# Altium PCB PCB_Auto_sedzia.PcbDoc
Units mm, origin at the board's own origin, x right, y up, seen from the top; angles counter-clockwise.
Board outline 95 x 65 mm, 2 copper layers (Top Layer, Bottom Layer); 65 components, 47 nets, 273 pads, 48 vias.
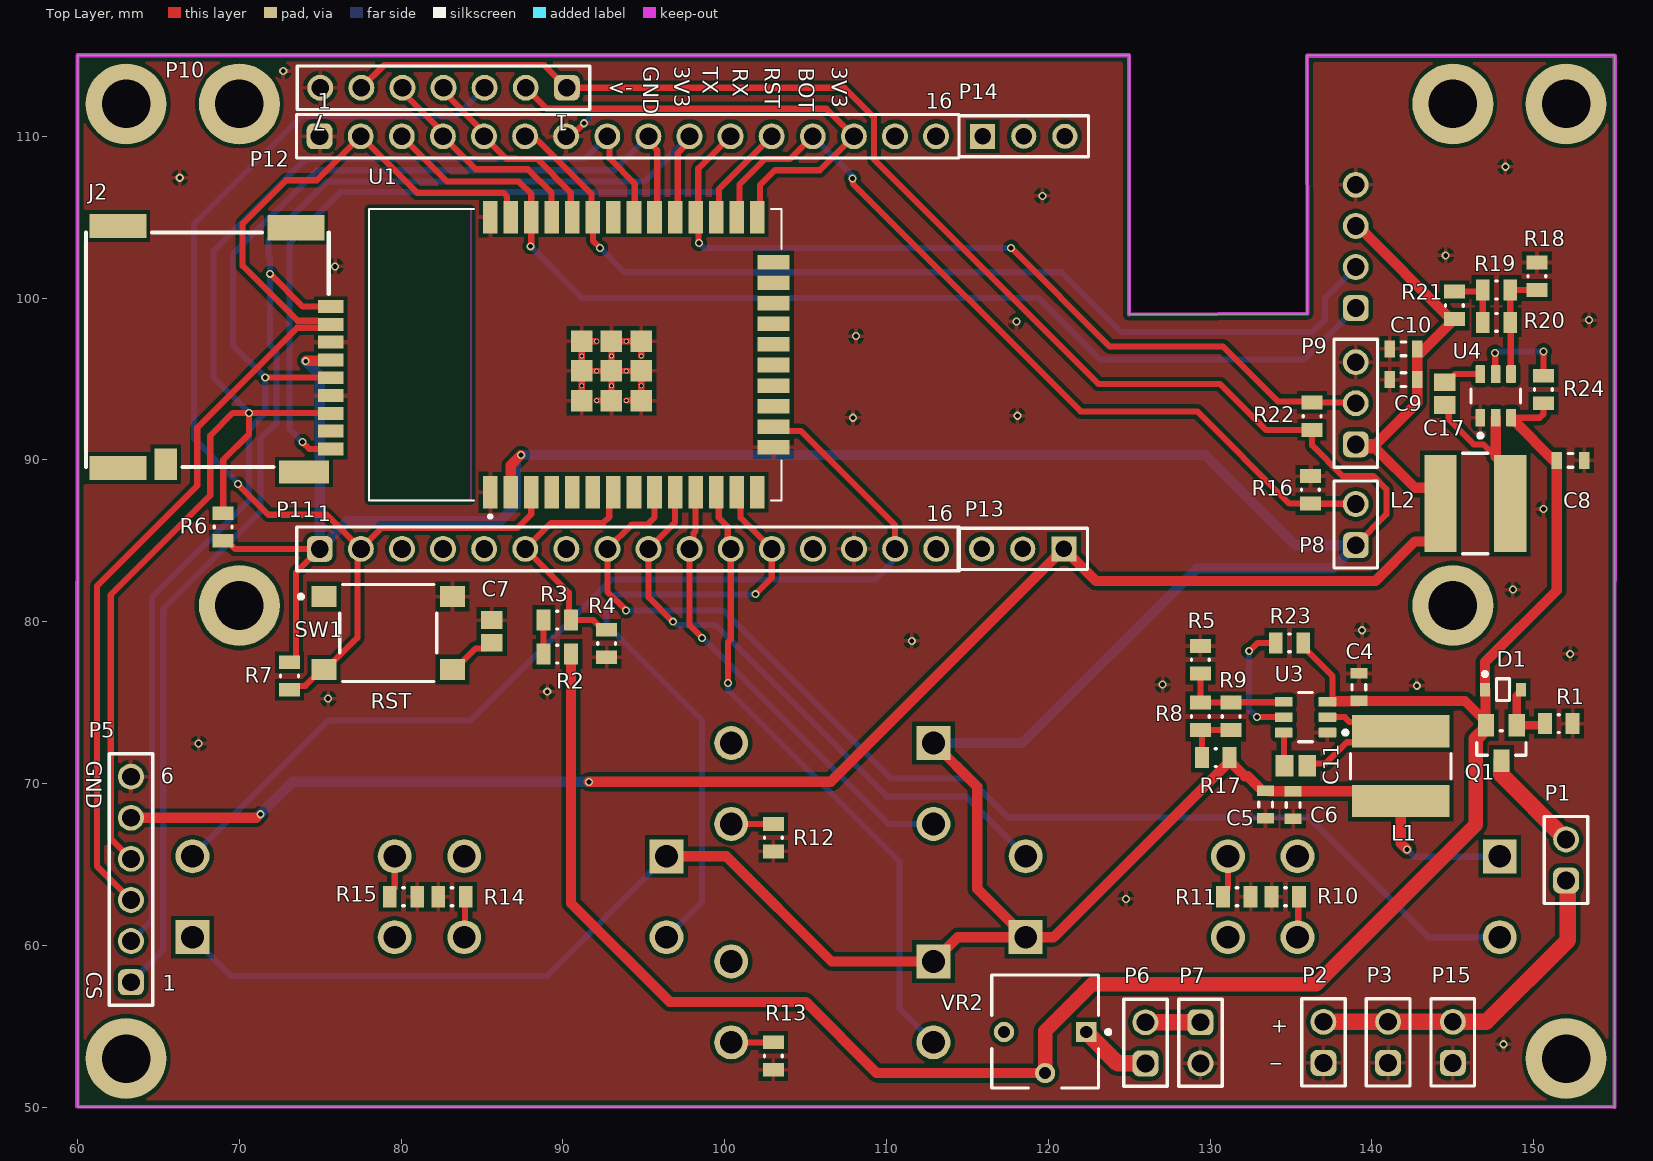
[diagram p0: Top Layer view]
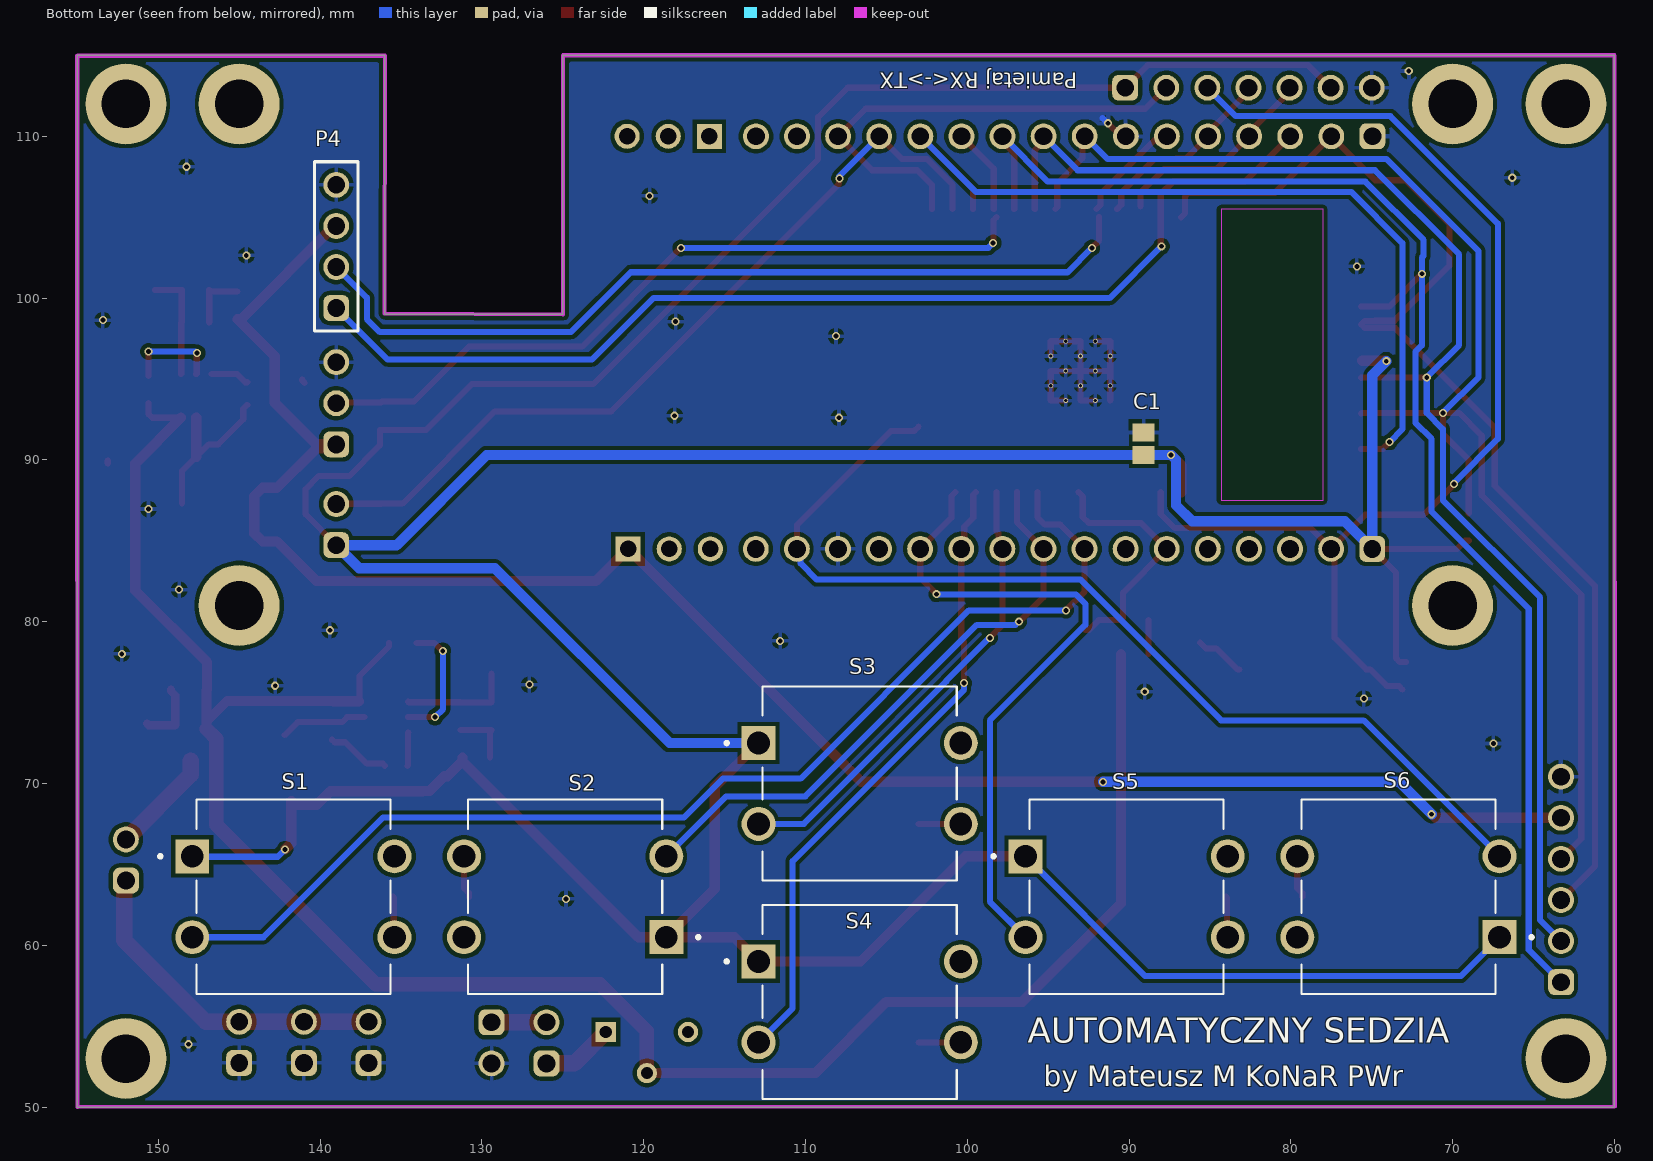
[diagram p1: Bottom Layer view, seen from below]

## Layer stack, top to bottom
Top Solder: solder mask 0.0102, Solder Resist, Dk 3.5
Top Layer: signal copper 0.0356
Dielectric 1: dielectric 0.32, FR-4, Dk 4.8
Bottom Layer: signal copper 0.0356
Bottom Solder: solder mask 0.0102, Solder Resist, Dk 3.5

## Board outline
60,50 60,115 125,115 125,99 136,99 136,115 155,115 155,50

## Design rules (kind name [scope] priority, off if disabled: settings)
Clearance [All] p1: gap=0.254 ignorepadtopadclearanceinfootprint=TRUE except(0: Arc-Hole Track-Hole SMDPad-Hole THPad-Hole Via-Hole Fill-Hole Poly-Hole Region-Hole Text-Hole; 0.127: SMDPad-SMDPad; 0.2: Arc-SMDPad Track-SMDPad; 0.5: THPad-THPad)
HoleSize [All] p1: absolutevalues=TRUE maxlimit=6.3 minlimit=0.3 maxpercent=80.000 minpercent=20.000
PolygonConnect [All] p1: connectstyle=Relief reliefconductorwidth=0.254 reliefentries=4 polygonreliefangle="90 Angle" airgapwidth=0.254
RoutingVias [All] p1: holewidth=0.3 width=0.5 viastyle="Through Hole" minholewidth=0.3 minwidth=0.5 maxholewidth=0.5 maxwidth=0.7
SilkToSolderMaskClearance [IsPad] p1: minsilkscreentomaskgap=0.1 clearancetoexposedcopper=TRUE
SolderMaskExpansion SolderMaskExpansion_Vias [IsVia] p1: expansion=0.102 istentingtop=TRUE
SolderMaskExpansion [All] p2: expansion=0.102 istentingtop=FALSE
Width [All] p1: maxlimit=2.54 minlimit=0.254 preferedwidth=0.5 minimp=50.000000 maximp=50.000000 favimp=50.000000
28 further rules are at their usual default settings.

## Components (designator, comment, footprint, x,y, rotation, side; value= is the part's Value field where it differs from the comment)
C1 "100n" CAPC2013X88X50LL20T25 89.1,91 r270 bottom
C4 "22uF" CAPC1608X100X20ML10 139.2,75.95 r270 top
C5 "22uF" CAPC1608X100X20ML10 133.423,68.691 r90 top
C6 "22uF" CAPC1608X100X20ML10 135.131,68.67 r90 top
C7 "100n" CAPC2013X88X50LL20T25 85.6,79.4 r270 top
C8 "22uF" CAPC1608X100X20ML10 152.276,89.972 r180 top
C9 "22uF" CAPC1608X100X20ML10 141.95,94.96 r0 top
C10 "22uF" CAPC1608X100X20ML10 141.95,96.86 r0 top
C11 "100n" CAPC2013X88X50LL20T25 135.3,71.1 r0 top
C17 "100n" CAPC2013X88X50LL20T25 144.5,94.1 r270 top
D1 "MM3Z10VT1G" ONSC-SOD-323-2-477-02_V 148.1,75.8 r0 top
J2 "PJS008-2003-0" PJS008-2003-0 75.526,96.8 r270 top
L1 "3.3uH" FP-SRN6045-MFG 141.779,71.071 r90 top
L2 "3.3uH" FP-SRN6045-MFG 146.392,87.306 r0 top
P1 "61300211121" 61300211121 152,65.27 r90 top
P2 "61300211121" 61300211121 137,54 r90 top
P3 "61300211121" 61300211121 141,54 r90 top
P4 "61300411121" 61300411121 139,103.19 r90 bottom
P5 "61300611121" 61300611121 63.3,64.07 r90 top
P6 "61300211121" 61300211121 126,53.97 r90 top
P7 "61300211121" 61300211121 129.4,53.97 r270 top
P8 "61300211121" 61300211121 139,86 r90 top
P9 "61300311121" 61300311121 139,93.5 r90 top
P10 "61300711121" 61300711121 82.62,113 r180 top
P11 "61301611121" 61301611121 94.02,84.5 r0 top
P12 "61301611121" 61301611121 94.01,110 r0 top
P13 "TSW-103-07-G-S" SMTC-TSW-103-07-X-S 120.96,84.5 r180 top
P14 "TSW-103-07-G-S" SMTC-TSW-103-07-X-S 115.94,110 r0 top
P15 "61300211121" 61300211121 145,54 r90 top
Q1 "FDN340P" FP-527AG-MFG 148,72.5 r270 top
R1 "10k" RESC0805(2012)_L 151.55,73.7 r180 top value="12000.00 Ohm"
R2 "47k" RESC0805(2012)_L 89.65,78 r0 top value="12000.00 Ohm"
R3 "47k" RESC0805(2012)_L 89.65,80.1 r180 top value="12000.00 Ohm"
R4 "47k" RESC0805(2012)_L 92.7,78.65 r90 top value="12000.00 Ohm"
R5 "10k" RESC0805(2012)_L 129.4,77.65 r270 top value="12000.00 Ohm"
R6 "10k" RESC0805(2012)_L 69,85.85 r90 top value="12000.00 Ohm"
R7 "10k" RESC0805(2012)_L 73.1,76.65 r90 top value="12000.00 Ohm"
R8 "47k" RESC0805(2012)_L 129.4,74.15 r90 top value="12000.00 Ohm"
R9 "47k" RESC0805(2012)_L 131.3,74.15 r90 top value="12000.00 Ohm"
R10 "10k" RESC0805(2012)_L 134.65,63 r0 top value="12000.00 Ohm"
R11 "10k" RESC0805(2012)_L 131.65,63 r180 top value="12000.00 Ohm"
R12 "10k" RESC0805(2012)_L 103,66.65 r90 top value="12000.00 Ohm"
R13 "10k" RESC0805(2012)_L 103,53.15 r90 top value="12000.00 Ohm"
R14 "10k" RESC0805(2012)_L 83.15,63 r0 top value="12000.00 Ohm"
R15 "10k" RESC0805(2012)_L 80.15,63 r180 top value="12000.00 Ohm"
R16 "10k" RESC0805(2012)_L 136.2,88.15 r270 top value="12000.00 Ohm"
R17 "10k" RESC0805(2012)_L 130.35,71.6 r180 top value="12000.00 Ohm"
R18 "10k" RESC0805(2012)_L 150.2,101.35 r270 top value="12000.00 Ohm"
R19 "47k" RESC0805(2012)_L 147.7,100.5 r0 top value="12000.00 Ohm"
R20 "10k" RESC0805(2012)_L 147.7,98.5 r0 top value="12000.00 Ohm"
R21 "47k" RESC0805(2012)_L 145.1,99.55 r90 top value="12000.00 Ohm"
R22 "10k" RESC0805(2012)_L 136.3,92.7 r270 top value="12000.00 Ohm"
R23 "10k" RESC0805(2012)_L 134.899,78.69 r0 top value="12000.00 Ohm"
R24 "10k" RESC0805(2012)_L 150.6,94.35 r270 top value="12000.00 Ohm"
S1 "TL1100F160Q" SW_TL1100F160Q 141.65,63 r180 bottom
S2 "TL1100F160Q" SW_TL1100F160Q 124.85,63 r0 bottom
S3 "TL1100F160Q" SW_TL1100F160Q 106.65,70 r180 bottom
S4 "TL1100F160Q" SW_TL1100F160Q 106.65,56.5 r180 bottom
S5 "TL1100F160Q" SW_TL1100F160Q 90.15,63 r180 bottom
S6 "TL1100F160Q" SW_TL1100F160Q 73.35,63 r0 bottom
SW1 "PTS645SM43SMTR92LFS" FP-PTS645SM43SMTR92LFS-MFG 79.2,79.3 r0 top
U1 "ESP32-WROOM-32D" MODULE_ESP32-WROOM-32D 90.76,96.5 r90 top
U3 "TPS563208DDCR" FP-DDC0006A-MFG 135.9,74.1 r180 top
U4 "TPS563208DDCR" FP-DDC0006A-MFG 147.65,93.95 r90 top
VR2 "500R" BOUR-3362P 119.8,54.675 r180 top

## Footprints (in the part's own frame and the unit in brackets; to place one, negate y for a bottom-side part, rotate by r counter-clockwise, add the part's x,y. Pads: shape width x height; smd on the part's side, far side on the other; paste and mask are expansions set on the pad)
61300211121 [mm] "Pin Header, pitch 2.54 mm, THT, Vertical, single row, 2p"
  rrect50% 1.6x1.6 hole 1.1: 1(-1.27,0)
  round 1.6 hole 1.1: 2(1.27,0)
  silkscreen extent -2.69,-1.35 2.69,1.35, body extent -2.54,-1.27 2.54,1.27, height 8.57
61300311121 [mm] "Pin Header, pitch 2.54 mm, THT, Vertical, single row, 3p"
  rrect50% 1.6x1.6 hole 1.1: 1(-2.54,0)
  round 1.6 hole 1.1: 2(0,0) 3(2.54,0)
  silkscreen extent -3.96,-1.35 3.96,1.35, body extent -3.81,-1.27 3.81,1.27, height 8.57
61300411121 [mm] "Pin Header, pitch 2.54 mm, THT, Vertical, single row, 4p"
  rrect50% 1.6x1.6 hole 1.1: 1(-3.81,0)
  round 1.6 hole 1.1: 2(-1.27,0) 3(1.27,0) 4(3.81,0)
  silkscreen extent -5.23,-1.35 5.23,1.35, body extent -5.08,-1.27 5.08,1.27, height 8.57
61300611121 [mm] "Pin Header, pitch 2.54 mm, THT, Vertical, single row, 6p"
  rrect50% 1.6x1.6 hole 1.1: 1(-6.35,0)
  round 1.6 hole 1.1: 2(-3.81,0) 3(-1.27,0) 4(1.27,0) 5(3.81,0) 6(6.35,0)
  silkscreen extent -7.77,-1.35 7.77,1.35, body extent -7.62,-1.27 7.62,1.27, height 8.57
61300711121 [mm] "Pin Header, pitch 2.54 mm, THT, Vertical, single row, 7p"
  rrect50% 1.6x1.6 hole 1.1: 1(-7.62,0)
  round 1.6 hole 1.1: 2(-5.08,0) 3(-2.54,0) 4(0,0) 5(2.54,0) 6(5.08,0) 7(7.62,0)
  silkscreen extent -9.04,-1.35 9.04,1.35, body extent -8.89,-1.27 8.89,1.27, height 8.57
61301611121 [mm] "Pin Header, pitch 2.54 mm, THT, Vertical, single row, 16p"
  rrect50% 1.6x1.6 hole 1.1: 1(-19.05,0)
  round 1.6 hole 1.1: 2(-16.51,0) 3(-13.97,0) 4(-11.43,0) 5(-8.89,0) 6(-6.35,0) 7(-3.81,0) 8(-1.27,0) 9(1.27,0) 10(3.81,0) 11(6.35,0) 12(8.89,0) 13(11.43,0) 14(13.97,0) 15(16.51,0) 16(19.05,0)
  silkscreen extent -20.47,-1.35 20.47,1.35, body extent -20.32,-1.27 20.32,1.27, height 8.57
BOUR-3362P [mm] "THD, 3-Leads, Body 6.6x6.99mm, Pitch 2.54mm"
  rect 1.25x1.25 hole 0.75: 1(-2.54,0.035)
  round 1.25 hole 0.75: 2(0,2.575) 3(2.54,0.035)
  silkscreen extent -4.03,-3.49 3.3,3.5, body extent -3.3,-3.49 3.3,3.49, height 4.95
CAPC1608X100X20ML10 [mm] "Chip Capacitor, 2-Leads, Body 1.70x0.90mm, IPC Low Density"
  rect 0.65x1.05 smd: 1(-0.85,0) 2(0.85,0)
  silkscreen extent -0.15,-0.43 0.15,0.43, body extent -0.85,-0.45 0.85,0.45, height 1
CAPC2013X88X50LL20T25 [mm] "Chip Capacitor, 2-Leads, Body 2.00x1.25mm, IPC High Density"
  rect 1.1x1.35 smd: 1(-0.7,0) 2(0.7,0)
  body extent -1.1,-0.72 1.1,0.72, height 0.88
FP-527AG-MFG [mm]
  rect 1.4x1 smd paste+0 mask+0: 1(-1.1,0.95) 2(-1.1,-0.95) 3(1.1,0)
  silkscreen extent -0.76,-1.52 0.76,1.52, body extent -1.9,-1.62 1.9,1.62, height 0.25
FP-DDC0006A-MFG [mm]
  rrect17% 1.1x0.6 smd paste+0 mask+0: 1(-1.35,0.95) 2(-1.35,0) 3(-1.35,-0.95) 4(1.35,-0.95) 5(1.35,0) 6(1.35,0.95)
  silkscreen extent -2.58,-1.53 0.42,1.53, body extent -2,-1.63 2,1.63, height 0.25
FP-PTS645SM43SMTR92LFS-MFG [mm]
  rect 1.55x1.3 smd paste+0 mask+0: 1(-3.975,2.25) 2(3.975,2.25) 3(-3.975,-2.25) 4(3.975,-2.25)
  silkscreen extent -5.52,-3 3,3, body extent -4.85,-3.1 4.85,3.1, height 0.25
FP-SRN6045-MFG [mm]
  rect 2x6 smd paste+0 mask+0: 1(-2.15,0) 2(2.15,0)
  silkscreen extent -0.77,-3.1 0.77,3.1, body extent -3.25,-3.2 3.25,3.2, height 0.25
MODULE_ESP32-WROOM-32D [mm]
  rect 2x0.9 smd: 1(-8.5,5.26) 2(-8.5,3.99) 3(-8.5,2.72) 4(-8.5,1.45) 5(-8.5,0.18) 6(-8.5,-1.09) 7(-8.5,-2.36) 8(-8.5,-3.63) 9(-8.5,-4.9) 10(-8.5,-6.17) 11(-8.5,-7.44) 12(-8.5,-8.71) 13(-8.5,-9.98) 14(-8.5,-11.25) 25(8.5,-11.25) 26(8.5,-9.98) 27(8.5,-8.71) 28(8.5,-7.44) 29(8.5,-6.17) 30(8.5,-4.9) 31(8.5,-3.63) 32(8.5,-2.36) 33(8.5,-1.09) 34(8.5,0.18) 35(8.5,1.45) 36(8.5,2.72) 37(8.5,3.99) 38(8.5,5.26)
  rect 0.9x2 smd: 15(-5.715,-12.25) 16(-4.445,-12.25) 17(-3.175,-12.25) 18(-1.905,-12.25) 19(-0.635,-12.25) 20(0.635,-12.25) 21(1.905,-12.25) 22(3.175,-12.25) 23(4.445,-12.25) 24(5.715,-12.25)
  rect 1.33x1.33 smd: 39_1(-2.835,-0.405) 39_2(-1,-0.405) 39_3(0.835,-0.405) 39_4(-2.835,-2.24) 39_5(-1,-2.24) 39_6(0.835,-2.24) 39_7(-2.835,-4.075) 39_8(-1,-4.075) 39_9(0.835,-4.075)
  round 0.3 hole 0.2: 39_10(-1.917,-0.405) 39_11(-0.082,-0.405) 39_12(-2.835,-1.322) 39_13(-1,-1.322) 39_14(0.835,-1.322) 39_15(-1.917,-2.24) 39_16(-0.082,-2.24) 39_17(-2.835,-3.157) 39_18(-1,-3.157) 39_19(0.835,-3.157) 39_20(-1.917,-4.075) 39_21(-0.082,-4.075)
  Keep-Out Layer region: 9,6.45 -9,6.45 -9,12.75 9,12.75
  silkscreen extent -10.1,-12.75 9,12.75, body extent -9,-12.75 9,12.75, height 3.25
ONSC-SOD-323-2-477-02_V [mm] "SOD, 2-Leads, Body 1.7x1.25mm"
  rect 0.63x0.83 smd: 1(-1.115,0) 2(1.115,0)
  silkscreen extent -1.24,-0.67 0.4,1.09, body extent -0.85,-0.63 0.85,0.63, height 1.06
PJS008-2003-0 [mm]
  rect 0.8x1.6 smd: 1(-2.675,0.124) 2(-1.575,0.124) 3(-0.475,0.124) 4(0.625,0.124) 5(1.725,0.124) 6(2.825,0.124) 7(3.925,0.124) 8(5.025,0.124) 9(6.125,0.124)
  rect 1.4x3.1 smd: 10(7.55,-1.526)
  rect 1.95x1.4 smd: 11(7.075,-10.076)
  rect 1.5x3.5 smd: 12(7.3,-13.026) 13(-7.65,-13.026)
  rect 1.6x3.5 smd: 14(-7.55,-2.026)
  silkscreen extent -7.25,-15 7.25,0
RESC0805(2012)_L [mm] "Chip Resistor, Body 2.0x1.3mm, IPC High Density"
  rect 0.85x1.3 smd: 1(-0.85,0) 2(0.85,0)
  silkscreen extent -0.05,-0.55 0.05,0.55, body extent -1.1,-0.67 1.1,0.68, height 0.7
SMTC-TSW-103-07-X-S [mm] ".025 SQ Post Terminal Strip Assembly, 1x3 Pins, Vertical, 2.54mm Pitch, Male"
  rect 1.55x1.55 hole 1.02: 1(0,0)
  round 1.55 hole 1.02: 2(2.54,0) 3(5.08,0)
  silkscreen extent -1.46,-1.27 6.54,1.27, body extent -1.27,-1.27 6.35,1.27, height 8.38
SW_TL1100F160Q [mm]
  rect 2.1x2.1 hole 1.4: 1(-6.25,2.5)
  round 2.1 hole 1.4: 2(6.25,2.5) 3(-6.25,-2.5) 4(6.25,-2.5)
  silkscreen extent -8.32,-6 6,6

## Part data
C1 C7 C11 C17: library part CMP-2007-00266-1, "0805", Manufacturer=Kemet, Part Number=C0805C103K5RACTU
C4 C5 C6 C8 C9 C10: library part CMP-2000-05440-1, "Chip Capacitor, 22 uF, +/- 20%, 6.3 V, -55 to 85 degC, 1608 (0603 Metric), RoHS, Tape and Reel", Capacitance=22µF, Manufacturer=TDK, Operating Temperature=-55degC~85degC, Package / Case=0603(1608Metric), Package Description="2-Pin Surface Mount Device, Body 1.6 x 0.8 mm", Package Reference=603, PCN Part Number=MLCCPartNumberChange30/Nov/2012, Ratings=-, Standard Package=1, Temperature Coefficient=X5R, Tolerance=±20%, Voltage - Rated=6.3V, Applications=GeneralPurpose, Category=Capacitors, Datasheet URL=http://www.farnell.com/datasheets/1913358.pdf, Datasheet Version=Mar-15, Design Resources=20WNon-IsolatedBuckLEDDriverUsingPLLNK460KG, Family=CeramicCapacitors, Features=-, Height - Seated (Max)=-, Kits=445-9003-KIT-ND-KITCAPCERHICAPMLCCSMD, Lead Spacing=-, Lead Style=-, Manufacturer URL=http://www.tdk.com/, Mounting Type=SurfaceMount,MLCC, Online Catalog=CSeries,GeneralPurpose, Other Names=445-8028-1, Packaging=CutTape(CT), Product Training Modules=CSeriesGeneralApplicationsSEAT,CCV,andTVCLDesignToolsGuidetoReplacinganElectrolyticCapacitorwithanMLCC, RoHS Information=RoHSCertificate-MLCC, Series=C, Size / Dimension="0.063\"Lx0.031\"W(1.60mmx0.80mm)", Thickness (Max)="0.039\"(1.00mm)"
D1: library part CMP-1060-00715-1, "Zener Voltage Regulator, 300 mW, 2-Pin SOD-323, Pb-Free, Tape and Reel", Manufacturer="On Semiconductor", ComponentLink1Description="Manufacturer URL", ComponentLink1URL=http://www.onsemi.com/, ComponentLink2Description=Datasheet, ComponentLink2URL=http://www.onsemi.cn/pub_link/Collateral/MM3Z2V4T1-D.PDF, ComponentLink3Description="Package Specification", ComponentLink3URL=http://www.onsemi.com/pub_link/Collateral/477-02.PDF.1, DatasheetVersion="Rev. 9", Mounting Technology="Surface Mount", P Max (W)=0.3, PackageDescription="2-Pin SOD, Body 1.7 x 1.25 mm", PackageReference=SOD-323-2-477-02, PackageVersion="Rev. H, 03/2007", Packing="Tape and Reel", PartNumber=MM3Z10VT1G, RoHS=Pb-Free, VZ Typ (V)=10
J2: "Memory Card Connectors MicroSD Crd Conn SMT Revrs Mnt Push-Push", Package=None, Check_prices=https://www.snapeda.com/parts/PJS008-2003-0/ICH/view-part/?ref=eda, MF="Yamaichi Electronics", MP=PJS008-2003-0, SnapEDA_Link=https://www.snapeda.com/parts/PJS008-2003-0/ICH/view-part/?ref=snap
L1 L2: library part CMP-07248-000070-1, "FIXED IND 47UH 1.1A 257 MOHM SMD", Case/Package=Nonstandard, Current Rating=1.1A, DC Resistance (DCR)=257mR, Inductance=47uH, Inductance Tolerance=30%, Max Operating Temperature=125°C, Min Operating Temperature=-40°C, Package Quantity=1000, Resistor Type=Wirewound, Saturation Current=1.3A, Self Resonant Frequency=7MHz, Test Frequency=100kHz, Tolerance=20%, Core Material=Ferrite, DC Current=1.1A, Depth=6.2mm, Height=4.5mm, Height - Seated (Max)=0.177inch, Length=6mm, Max DC Current=1.1A, Military Standard=Not, Mount="Surface Mount", Number of Pins=2, Packaging="Tape and Reel", REACH SVHC="No SVHC", RMS Current (Irms)=1.1A, RoHS Compliant=Yes, Series=SRN6045, Shielding=Shielded, Termination=SMD/SMT, Width=0.236inch
P1 P2 P3 P6 P7 P8 P15: library part CMP-1712-00002-5, Color=Black, Contact Resistance=20mΩ, Current Rating=3A, Max Operating Temperature=125°C, Min Operating Temperature=-40°C, Operating Supply Voltage=250V, Connector Type="Male Pin", Contact Gender=Male, Contact material=Copper, Contact Mating Length=5.9944mm, Contact Plating=Gold, Gender=Male, Height=8.94mm, Housing material=PBT, Lead Free="Lead Free", Lead Pitch=2.54mm, Mount="Through Hole", NexarPartId=20081794, Number of Contacts=2, Number of Pins=2, Number of Positions=2, Number of Rows=1, Orientation=Vertical, Packaging=Bulk, Pitch=2.54mm, REACH SVHC="No SVHC", RoHS=Compliant, Termination="Through Hole", Voltage Rating=250V
P4: library part CMP-1502-01064-2, Color=Black, Contact Resistance=20mΩ, Current Rating=3A, Max Operating Temperature=105°C, Min Operating Temperature=-40°C, Operating Supply Voltage=250V, Connector Type="Male Pin", Contact material=Copper, Contact Mating Length=5.9944mm, Contact Plating=Gold, Gender=Male, Height=8.89mm, Lead Free="Lead Free", Lead Pitch=2.54mm, Mount="Through Hole", NexarPartId=32855522, Number of Contacts=4, Number of Pins=4, Number of Positions=4, Number of Rows=1, Orientation=Vertical, Packaging=Bulk, Pitch=2.54mm, REACH SVHC=Unknown, RoHS=Compliant, Termination=Solder, Voltage Rating=250V
P5: library part CMP-1502-01070-2, Color=Black, Contact Resistance=20mΩ, Current Rating=3A, Max Operating Temperature=105°C, Min Operating Temperature=-40°C, Operating Supply Voltage=250V, Connector Type="Male Pin", Contact Gender=Male, Contact material=Copper, Contact Mating Length=5.9944mm, Contact Plating=Gold, Gender=Male, Height=8.89mm, Housing material=PBT, Lead Free="Lead Free", Lead Pitch=2.54mm, Mount="Through Hole", NexarPartId=20084590, Number of Contacts=6, Number of Pins=6, Number of Positions=6, Number of Rows=1, Orientation=Vertical, Packaging=Bulk, Pitch=2.54mm, REACH SVHC=Unknown, RoHS=Compliant, Termination="Through Hole", Voltage Rating=250V
P9: library part CMP-1502-01062-2, Color=Black, Contact Resistance=20mΩ, Current Rating=3A, Max Operating Temperature=105°C, Min Operating Temperature=-40°C, Operating Supply Voltage=250V, Connector Type="Male Pin", Contact material=Copper, Contact Mating Length=5.9944mm, Contact Plating=Gold, Gender=Male, Height=8.94mm, Lead Free="Lead Free", Lead Pitch=2.54mm, Mount="Through Hole", NexarPartId=32855521, Number of Contacts=3, Number of Pins=3, Number of Positions=3, Number of Rows=1, Orientation=Vertical, Packaging=Bulk, Pitch=2.54mm, REACH SVHC=Unknown, RoHS=Compliant, Termination=Solder, Voltage Rating=250V
P10: library part CMP-1502-01074-2, Color=Black, Contact Resistance=20mΩ, Current Rating=3A, Operating Supply Voltage=250V, Connector Type="Male Pin", Contact material=Copper, Contact Mating Length=5.9944mm, Contact Plating=Gold, Gender=Male, Lead Pitch=2.54mm, Mount="Through Hole", NexarPartId=32855531, Number of Contacts=7, Number of Pins=7, Number of Positions=7, Number of Rows=1, Orientation=Vertical, Packaging=Bulk, Pitch=2.54mm, REACH SVHC=Unknown, RoHS=Compliant, Termination=Solder
P11 P12: library part CMP-1502-01095-3, Color=Black, Contact Resistance=20mΩ, Current Rating=3A, Max Operating Temperature=105°C, Min Operating Temperature=-40°C, Operating Supply Voltage=250V, Connector Type="Male Pin", Contact material=Copper, Contact Mating Length=5.9944mm, Contact Plating=Gold, Gender=Male, Height=8.89mm, Lead Pitch=2.54mm, Mount="Through Hole", NexarPartId=32855548, Number of Contacts=16, Number of Pins=16, Number of Positions=16, Number of Rows=1, Orientation=Vertical, Packaging=Bulk, Pitch=2.54mm, REACH SVHC=Unknown, RoHS=Compliant, Termination=Solder, Voltage Rating=250V
P13 P14: library part CMP-1024-00333-1, "0.025\" SQ Post Header, Through-hole, Vertical, -55 to 125 degC, 2.54 mm Pitch, 3-Pin, Male, RoHS", Manufacturer=Samtec, Temperature Range="-55 to 125 degC", ComponentLink1Description="Manufacturer URL", ComponentLink1URL=http://www.samtec.com, ComponentLink2Description=Datasheet, ComponentLink2URL=http://www.samtec.com/documents/webfiles/pdf/TSW_TH.PDF, ComponentLink3Description="Package Specification", ComponentLink3URL=http://www.samtec.com/documents/webfiles/cpdf/TSW-XXX-XX-XXX-X-XX-XXX-MKT.pdf, DatasheetVersion=F-214, Mounting Technology=Through-hole, Orientation=Vertical, PackageDescription=".025[0.64] SQ. Post Terminal Strip Assembly", PackageReference=TSW-103-07-X-S, PackageVersion="DM, 8/1988", PartNumber=TSW-103-07-G-S, Pitch="2.54 mm", RoHS=True
Q1: library part CMP-2100-03638-2, "MOSFET P-CH 20V 2A SSOT3", Case/Package=SOT-23, Continuous Drain Current (ID)=2A, Current Rating=-2A, Drain to Source Breakdown Voltage=-20V, Drain to Source Resistance=60mR, Drain to Source Voltage (Vdss)=20V, Gate to Source Voltage (Vgs)=8V, Input Capacitance=779pF, Max Operating Temperature=150°C, Max Power Dissipation=500mW, Min Operating Temperature=-55°C, On-State Resistance=70MR, Package Quantity=1, Threshold Voltage=-800mV, Contact Plating=Tin, Dual Supply Voltage=-20V, Element Configuration=Single, Fall Time=11ns, Height=0.94mm, Lead Free="Lead Free", Length=2.92mm, Mount="Surface Mount", Nominal Vgs=-800mV, Number of Elements=1, Number of Pins=3, Packaging="Tape and Reel", Power Dissipation=500mW, Radiation Hardening=No, Rds On Max=70mR, REACH SVHC="No SVHC", Rise Time=9ns, Termination=SMD/SMT, Turn-Off Delay Time=27ns, Turn-On Delay Time=10ns, Voltage Rating (DC)=-20V, Weight=0.03g, Width=3.05mm
R1 R2 R3 R4 R5 R6 R7 R8 R9 R10 R11 R12 R13 R14 R15 R16 R17 R18 R19 R20 R21 R22 R23 R24: library part CMP-1013-00631-1, "10K 0.125W 1% 0805 (2012 Metric)  SMD", Case-EIA=0805, Case-Metric=2012, Power="0.125 W", Tolerance="1 %", Technology=SMT
S1 S2 S3 S4 S5 S6: Package=None, Availability=Unavailable, MP=TL1100F160Q, Price=None
SW1: library part CMP-2000-05160-2, "SWITCH TACTILE SPST-NO 0.05A 12V", Case/Package=SMD/SMT, Color=Black, Contact Resistance=100mR, Current Rating=50mA, Max Operating Temperature=60°C, Max Voltage Rating (DC)=12V, Min Operating Temperature=-20°C, Operating Force=160gf, Package Quantity=1, Actuator Length=0.85mm, Actuator Material=Nylon, Actuator Type=Standard, Contact material=Silver, Contact Plating=Silver, Depth=9mm, Illumination Type=Non-Illuminated, Lead Free="Lead Free", Length=6mm, Max Current Rating=50mA, Mechanical Life=100000Cycles, Mount="Surface Mount", Orientation=Straight, Packaging="Tape and Reel", REACH SVHC="No SVHC", Switch Function=Off-Mom, Termination="Gull Wing", Throw Configuration=SPST, Voltage Rating (DC)=12V
U1: "Bluetooth, WiFi 802.11b/g/n, Bluetooth v4.2 +EDR, Class 1, 2 and 3 Transceiver Module 2.4GHz ~ 2.5GHz Integrated", Package="Module Espressif Systems", Availability="In Stock", Check_prices=https://www.snapeda.com/parts/ESP32-WROOM-32D/Espressif+Systems/view-part/?ref=eda, MF="Espressif Systems", MP=ESP32-WROOM-32D, Price=None, Purchase-URL=https://pricing.snapeda.com/search/part/ESP32-WROOM-32D/?ref=eda, SnapEDA_Link=https://www.snapeda.com/parts/ESP32-WROOM-32D/Espressif+Systems/view-part/?ref=snap
U3 U4: library part CMP-04918-000356-1, "IC REG BUCK ADJ 3A TSOT23-6", Case/Package=SOT-23-6, Max Input Voltage=17V, Max Operating Temperature=125°C, Max Output Voltage=7V, Min Input Voltage=4.5V, Min Operating Temperature=-40°C, Min Output Voltage=768mV, Output Current=3A, Quiescent Current=400uA, Switching Frequency=580kHz, Lead Free="Lead Free", Mount="Surface Mount", Number of Outputs=1, Output Configuration=Positive, Output Type=Adjustable, Packaging="Tape and Reel", RoHS Compliant=Yes, Synchronous Rectifier=Yes
VR2: library part CMP-1747-00004-1, "Square Trimpot(R) Trimming Potentiometer, 10 KOhm, 300 V, -55 to 125 degC, 3-Pin THD, RoHS, Tube", Case Code (Imperial)=0612, Case Code (Metric)=1632, Case/Package=1206, Max Operating Temperature=125degC, Min Operating Temperature=-25degC, Package Quantity=5000, Power Rating="1 W", Resistance="50 mohm", Tolerance=1%, Voltage Rating="220 mV", ComponentLink1Description="Manufacturer URL", ComponentLink1URL=http://www.bourns.com/, ComponentLink2Description=Datasheet, ComponentLink2URL=http://www.bourns.com/docs/Product-Datasheets/3362.pdf, DatasheetVersion=May-16, Height="0.6 mm", Length="3.2 mm", Mount="Surface Mount", PackageDescription="3-Pin Through Hole Device, Body 6.6 x 6.99 mm, Pitch 2.54 mm", PackageReference=3326P, Packaging="Tape and Reel", Pins=2, REACH SVHC="No SVHC", RoHSCompliant=True, Width="1.6 mm"

## Free pads (board coordinates)
  round 5 hole 3: 0(63,53) 0(63,112) 0(70,81) 0(70,112) 0(145,81) 0(145,112) 0(152,53) 0(152,112)

## Via types
v1: diameter 0.5, hole 0.3, Top Layer to Bottom Layer, tented both sides, 48 vias

## Nets (pads, with @x,y where several pads share a name; then routed paths per layer and width w, separated by ;. In a path a pad name is that pad's centre, name@x,y a point inside that pad or via, vN(x,y) a via of type N, cw(c..) or ccw(c..) an arc to the next point about the centre after c; other vN are vias at no path point)
+3V3: C1.2 C5.2 C6.2 J2.4 L1.1 P8.1 P10.1 P10.6 P11.1 R6.1 R7.2 R17.1 R22.2 S1.1 S2.1 S3.1 S4.1 S5.1 S6.1 U1.2 | length 324.4
  Top Layer w0.381: R6.1 69.225,85 69.725,84.5 P11.1 73.5,83.03 73.5,77.735 73.265,77.5 R7.2 R7.2@72.875,77.5 ; v1(74.1,96.1) v1@74.123,96.123 ; J2.4@75.598,96.123 J2.4 ; P10.6 78.94,114.4 88.84,114.4 P10.1 107.4,113 109.225,111.176 109.225,108.576 123.1,94.7 130.6,94.7 133.45,91.85 R22.2 136.3,90.9 138.2,89 140.1,89 140.9,88.2 140.9,86.63 P8.1
  Top Layer w0.635: v1@74.123,96.123 J2.4@75.598,96.123 ; U1.2 86.77,89.67 v1(87.4,90.3) ; S5.1 100.1,65.5 106.6,59 S4.1 114.4,60.5 S2.1 ; S3.1 115.6,69.8 115.6,63.5 S2.1 ; R17.1 R17.1@131.2,71.375 ; L1.1@141.779,68.687 140.192,68.687 139.359,69.52 C6.2 133.643,69.52 133.623,69.541 C5.2 133.223,69.541 132.317,70.447 132.128,70.447 R17.1@131.2,71.375 ; L1.1 141.779,66.314 v1(142.163,65.93) ; S2.1 120.325,60.5 R17.1@131.2,71.375
  Bottom Layer w0.381: S6.1 69.5,58.1 89,58.1 S5.1 ; v1@142.18,65.875 142.213,65.875 142.614,65.474 147.874,65.474 S1.1
  Bottom Layer w0.635: v1(74.1,96.1) 74.97,95.23 P11.1 76.67,86.2 86.1,86.2 87.1,87.2 87.1,90 v1(87.4,90.3) C1.2 129.7,90.3 135.27,84.73 P8.1 137.57,83.3 129.2,83.3 118.4,72.5 S3.1
+5: C9.2 C10.2 L2.1 P4.3 P5.5 P9.1 P13.1 R21.1 | length 117.8
  Top Layer w0.381: 71.048,67.88 71.268,68.1 v1(71.3,68.1)
  Top Layer w0.635: P5.5 71.048,67.88 ; v1(91.6,70.1) 106.56,70.1 P13.1 122.949,82.511 140.211,82.511 142.661,84.961 143.559,84.961 144.06,85.462 144.06,87.77 143.559,88.271 142.661,88.271 140.208,90.725 139.235,90.725 P9.1 139.235,90.96 140.208,90.96 ; P4.3 139.115,104.46 144.875,98.7 R21.1 142.8,96.4 142.8,93.534 140.226,90.96
  Bottom Layer w0.635: v1(71.3,68.1) 73.3,70.1 v1(91.6,70.1)
+BAT: C4.2 C8.2 D1.1 Q1.2 R2.2 R23.2 R24.2 U3.3 U4.3 VR2.2 | length 129.1
  Top Layer w0.381: R23.2 135.749,78.465 137.562,76.652 137.562,75.115 U3.3@137.602,75.075 ; U4.3 150.377,92.6 150.6,92.823 R24.2
  Top Layer w0.635: R2.2 90.5,62.6 96.6,56.5 105,56.5 109.4,52.1 VR2.2 ; U3.3@137.602,75.075 139.175,75.075 C4.2 145.75,75.1 Q1.2@147.018,73.832 ; Q1.2@147.018,73.368 Q1.2@147.018,73.832 ; U4.3 151.426,89.774 151.426,81.926 146.985,77.485 D1.1 147.018,75.768 Q1.2@147.018,73.832
  Top Layer w0.889: VR2.2 119.8,54.7 122.7,57.6 136.562,57.6 146.412,67.45 146.412,72.762 Q1.2@147.018,73.368
BAT: P1.1 P2.2 P3.2 P15.2 | length 20.9
  Top Layer w1.016: P2.2 P3.2 P15.2 147.07,55.27 152.1,60.3 152.1,63.9 P1.1
BAT_LVL: P11.6 R3.1 R4.2 U1.7 | length 15.7
  Top Layer w0.381: R4.2 92.475,79.5 91.875,80.1 R3.1 90.37,80.23 90.37,81.8 P11.6 89.27,86.1 92.5,86.1 92.86,86.46 92.86,87.74 U1.7
BOOT: P10.2 P12.14 U1.25 | length 30.1
  Top Layer w0.381: P10.2 89,111.7 106.28,111.7 P12.14 105.88,107.9 103.1,107.9 102.175,106.975 U1.25@102.175,105.5
CARD_DETECT: J2.9 P12.12 U1.27 | length 52.9
  Top Layer w0.381: v1(73.9,91.1) 74.325,90.675 J2.9 ; U1.27@99.635,105.5 99.635,106.735 P12.12
  Bottom Layer w0.381: v1(73.9,91.1) 73.1,91.9 73.1,103.4 76.265,106.565 99.465,106.565 P12.12
CS: J2.1 P5.1 P12.10 U1.29 | length 87.9
  Top Layer w0.381: v1(71.9,101.5) 73.925,99.475 J2.1 ; U1.29@97.095,105.5 97.1,105.505 97.1,108.95 97.82,109.67 P12.10
  Bottom Layer w0.381: P5.1 65.3,59.72 65.3,80.8 71.3,86.8 71.3,91.3 72.3,92.3 72.3,96.684 71.9,97.084 71.9,102.516 71.8,102.616 71.8,103.6 75.4,107.2 95.02,107.2 P12.10
DOWN: P11.11 S4.3 U1.12 | length 39.7
  Top Layer w0.381: U1.12 99.631,87.839 99.631,86.428 100.188,85.872 100.188,84.682 P11.11 100.37,78.912 100.2,78.742 v1(100.2,76.2)
  Bottom Layer w0.381: v1(100.2,76.2) 100.2,75.8 110.8,65.2 110.8,56.1 S4.3
EN: P10.3 P11.2 R7.1 SW1.3 U1.3 | length 71.8
  Top Layer w0.381: v1(69.906,88.5) 71.8,86.605 75.405,86.605 P11.2 ; R7.1 73.335,76.035 74.085,76.035 75.1,77.05 SW1.3 75.35,77.05 77.3,79 77.3,84.29 P11.2 ; U1.3 88.04,86.64 87.2,85.8 78.81,85.8 P11.2
  Bottom Layer w0.381: v1(69.906,88.5) 69.883,88.523 69.883,88.617 67.2,91.3 67.2,104.6 73.845,111.245 83.405,111.245 P10.3
ESC: P11.8 S1.3 U1.9 | length 71.9
  Top Layer w0.381: v1(93.9,80.7) 92.75,81.85 P11.8 94.25,86 95.2,86 95.66,86.46 U1.9
  Bottom Layer w0.381: v1(93.9,80.7) 99.9,80.7 110.3,70.3 115.1,70.3 117.5,67.9 136.1,67.9 143.5,60.5 S1.3
FLOW_METER: P9.2 P12.11 R22.1 U1.28 | length 51.7
  Top Layer w0.381: U1.28 98.377,104.823 98.377,103.423 v1(98.4,103.4) ; U1.28@98.365,105.5 98.365,108.005 P12.11 ; v1(117.7,103.1) 123.8,97 130.8,97 134.2,93.6 136.2,93.6 136.25,93.55 138.95,93.55 P9.2 P9.2@139.025,93.475
  Bottom Layer w0.381: v1(98.4,103.4) 98.7,103.1 v1(117.7,103.1)
GND: C1.1 C4.1 C5.1 C6.1 C7.1 C8.1 C9.1 C10.1 J2.3 J2.6 P2.1 P3.1 P4.4 P5.6 P7.2 P9.3 P10.7 P11.14 P12.1 P12.7 P15.1 R1.1 R4.1 R5.1 R10.1 R11.1 R12.1 R13.1 R14.1 R15.1 R16.1 R18.1 SW1.2 U1.1 U1.15 U1.38 U1.39_1 U1.39_2 U1.39_3 U1.39_4 U1.39_5 U1.39_6 U1.39_7 U1.39_8 U1.39_9 U1.39_10 U1.39_11 U1.39_12 U1.39_13 U1.39_14 U1.39_15 U1.39_16 U1.39_17 U1.39_18 U1.39_19 U1.39_20 U1.39_21 U3.1 U4.1 | length 20.7
  Top Layer w0.381: P12.7 90.494,110 v1(91.303,110.809) ; U1.39_1 U1.39_10 U1.39_2 ; U1.39_12 U1.39_4 U1.39_15 U1.39_5 ; U1.39_14 U1.39_3 U1.39_11 U1.39_2 ; U1.39_17 U1.39_7 U1.39_20 U1.39_8 U1.39_18 U1.39_5 ; U1.39_21 U1.39_9 U1.39_19 U1.39_6 U1.39_16 U1.39_5 ; C9.1@140.965,94.764 141.1,94.898 C9.1 ; C8.1@153.126,89.772 C8.1 ; U1.39_2 U1.39_13 U1.39_5
  Bottom Layer w0.381: v1(91.303,110.809) 91.335,110.809 91.638,111.112
  other v1: 148.128,53.881 124.797,62.869 67.483,72.472 75.486,75.243 89.03,75.674 142.773,76.043 127.065,76.107 152.253,78.013 111.561,78.813 139.393,79.472 148.709,81.979 150.605,86.961 107.929,92.603 118.086,92.726 108.114,97.651 118.022,98.546 153.423,98.636 75.917,101.96 144.558,102.637 119.629,106.319 66.314,107.439 148.252,108.116 72.716,114.026
LEFT: P11.9 S2.3 U1.10 | length 37.1
  Top Layer w0.381: v1(96.8,80) 95.29,81.51 P11.9 96.93,86.14 U1.10
  Bottom Layer w0.381: v1(96.8,80) 96.832,80 97.032,79.8 99.4,79.8 110,69.2 114.9,69.2 S2.3
MISO: J2.7 P5.4 P12.8 R6.2 U1.31 | length 87.6
  Top Layer w0.381: P5.4 62.055,66.584 62.055,81.656 68.2,87.8 68.2,91.5 69.6,92.9 v1(70.6,92.9) ; R6.2 69,90 70.6,91.6 v1(70.6,92.9) ; J2.7 75.637,92.887 70.613,92.887 v1(70.6,92.9) ; P12.8 92.879,109.861 92.879,108.629 94.436,107.072 94.436,105.619 U1.31@94.555,105.5
  Bottom Layer w0.381: v1(70.6,92.9) 68.4,95.1 68.4,102.9 74.1,108.6 91.34,108.6 P12.8
MOSI: J2.2 P5.3 P12.2 U1.37 | length 74.6
  Top Layer w0.381: P5.3 61.2,64.9 61.2,82.2 67.4,88.4 67.4,92 73.565,98.165 75.44,98.165 J2.2 75.44,98.585 74.833,98.585 74.817,98.6 73.6,98.6 70.2,102 70.2,104.6 72.883,107.283 74.783,107.283 P12.2 81,106.5 86.327,106.5 86.551,106.277 86.551,105.219 U1.37
NetC7_2: C7.2 SW1.4 | length 3.1
  Top Layer w0.381: SW1.4 83.3,77.05 84.59,78.34 85.24,78.34 C7.2
NetC11_1: C11.1 U3.6 | length 2.1
  Top Layer w0.381: U3.6 134.575,73.125 134.575,71.125 C11.1
NetC11_2: C11.2 L1.2 U3.2 | length 9.3
  Top Layer w0.381: C11.2 136.125,71.225 137.125,71.225 138.45,72.55 139.098,72.55 L1.2@139.255,72.707 ; U3.2 138.321,74.1 138.624,73.797 141.383,73.797 L1.2@142.192,72.987
NetC17_1: C17.1 U4.6 | length 2.4
  Top Layer w0.381: C17.1 144.625,94.8 145.125,95.3 U4.6
NetC17_2: C17.2 L2.2 U4.2 | length 10.5
  Top Layer w0.381: C17.2 144.751,93.149 144.751,92.502 146.292,90.96 146.887,90.96 147.65,90.197 148.542,89.306 L2.2
  Top Layer w0.635: L2.2@147.65,90.197 U4.2
NetD1_2: D1.2 Q1.1 R1.2 | length 4.1
  Top Layer w0.508: D1.2 149.215,75.7 148.95,75.435 Q1.1 150.6,73.6 R1.2
NetP1_2: P1.2 Q1.3 | length 6.5
  Top Layer w1.016: Q1.3 148,70.54 P1.2
NetP6_1: P6.1 VR2.1 | length 4.5
  Top Layer w1.016: VR2.1 124.28,52.7 P6.1
NetP6_2: P6.2 P7.1 | length 3.4
  Top Layer w1.016: P6.2 P7.1
NetR2_1: R2.1 R3.2 | length 2.1
  Top Layer w0.381: R2.1 R3.2
NetR5_2: R5.2 R8.2 R9.2 U3.4 | length 7
  Top Layer w0.381: R5.2 R8.2 R9.2 131.325,75.025 134.525,75.025 U3.4
NetR8_1: R8.1 R9.1 R17.2 | length 3.6
  Top Layer w0.381: R17.2 129.5,73.2 R8.1 R9.1
NetR10_2: R10.2 S1.4 | length 2.5
  Top Layer w0.381: S1.4 135.45,60.55 135.45,62.95 R10.2
NetR11_2: R11.2 S2.4 | length 2.6
  Top Layer w0.381: R11.2 130.8,63.225 131.1,63.525 S2.4
NetR12_2: R12.2 S3.4 | length 2.6
  Top Layer w0.381: S3.4 R12.2
NetR13_2: R13.2 S4.4 | length 2.6
  Top Layer w0.381: S4.4 R13.2
NetR14_2: R14.2 S5.4 | length 2.5
  Top Layer w0.381: S5.4 83.95,60.55 83.95,62.95 R14.2
NetR15_2: R15.2 S6.4 | length 2.6
  Top Layer w0.381: R15.2 79.3,63.225 79.6,63.525 S6.4
NetR18_2: R18.2 R19.2 R20.2 U4.4 | length 6.9
  Top Layer w0.381: R19.2 R20.2 148.575,98.475 148.575,95.325 U4.4 ; R19.2 R18.2
NetR19_1: R19.1 R20.1 R21.2 | length 3.8
  Top Layer w0.381: R21.2 146.75,100.4 R19.1 R20.1
NetR23_1: R23.1 U3.5 | length 7.8
  Top Layer w0.381: v1(132.414,78.196) 132.446,78.196 132.94,78.69 R23.1 ; v1(132.9,74.1) U3.5
  Bottom Layer w0.381: v1@132.4,78.2 132.4,74.6 v1(132.9,74.1)
NetR24_1: R24.1 U4.5 | length 5.9
  Top Layer w0.381: v1(147.6,96.6) 147.623,96.577 147.623,95.327 U4.5 ; R24.1 v1(150.6,96.7)
  Bottom Layer w0.381: v1(147.6,96.6) 147.7,96.7 v1(150.6,96.7)
OK: P11.15 S6.3 U1.16 | length 63.2
  Top Layer w0.381: U1.16 103.27,91.795 104.705,91.795 110.53,85.97 P11.15
  Bottom Layer w0.381: S6.3 75.5,73.9 84.3,73.9 93,82.6 109.3,82.6 110.297,83.597 110.297,84.267 P11.15
RIGHT: P11.12 S5.3 U1.13 | length 41
  Top Layer w0.381: U1.13 100.981,87.758 100.981,86.428 P11.12 102.91,82.71 v1(101.9,81.7)
  Bottom Layer w0.381: S5.3 98.6,62.7 98.6,73.9 92.7,79.8 92.7,81.1 93.277,81.677 101.877,81.677 v1(101.9,81.7)
RX: P10.4 P12.5 U1.34 | length 12
  Top Layer w0.381: P10.4 82.62,112.75 85.12,110.25 P12.5 86.505,108.615 87.086,108.615 87.1,108.6 88.4,108.6 90.485,106.515 90.485,105.76 U1.34@90.745,105.5
SCK: J2.5 P5.2 P12.9 U1.30 | length 84.2
  Top Layer w0.381: v1(71.6,95.1) 71.613,95.087 75.637,95.087 J2.5 ; P12.9 95.28,109.67 95.825,109.125 U1.30@95.825,105.5
  Bottom Layer w0.381: P5.2 64.6,61.56 64.6,81.5 70.6,87.5 70.6,91.9 71.6,92.9 v1(71.6,95.1) 69.6,97.1 69.6,102.7 74.8,107.9 93.18,107.9 P12.9
SCL: P4.1 P12.3 U1.36 | length 67.9
  Top Layer w0.381: P12.3 82.84,107.2 87.277,107.2 88.04,106.437 88.04,103.272 88,103.232 v1(88,103.2)
  Bottom Layer w0.381: v1(88,103.2) 91.2,100 119.4,100 123.2,96.2 135.82,96.2 P4.1
SDA: P4.2 P12.6 U1.33 | length 60
  Top Layer w0.381: P12.6 87.893,109.767 88.408,109.767 88.494,109.681 88.519,109.681 91.755,106.445 91.755,105.76 U1.33@92.015,105.5 ; U1.33 91.85,103.55 v1(92.3,103.1)
  Bottom Layer w0.381: v1(92.3,103.1) 93.8,101.6 120.8,101.6 124.5,97.9 136.3,97.9 137.1,98.7 137.1,100.02 P4.2
TX: P10.5 P12.4 U1.35 | length 13
  Top Layer w0.381: P10.5 80.08,112.75 82.58,110.25 P12.4 84.615,107.965 87.835,107.965 89.3,106.5 U1.35@89.3,105.675
UP: P11.10 S3.3 U1.11 | length 28.6
  Top Layer w0.381: U1.11 98.2,85.6 98.063,85.463 98.063,84.733 P11.10 97.83,79.77 v1(98.6,79)
  Bottom Layer w0.381: v1(98.6,79) 98.632,79 101.294,76.338 101.294,76.306 110.1,67.5 S3.3
VALVE: P8.2 P12.13 R16.2 U1.26 | length 50.6
  Top Layer w0.381: U1.26@100.905,105.5 100.905,107.005 102.5,108.6 104.04,108.6 P12.13 ; v1(107.9,107.4) 107.923,107.377 107.923,107.077 122,93 129.2,93 134.9,87.3 R16.2 136.215,87.285 138.985,87.285 P8.2 P8.2@139.035,87.235
  Bottom Layer w0.381: P12.13 107.877,107.563 107.877,107.423 v1(107.9,107.4)
pads on no net: J2.8 J2.10 J2.11 J2.12 J2.13 J2.14 P11.3 P11.4 P11.5 P11.7 P11.13 P11.16 P12.15 P12.16 P13.2 P13.3 P14.1 P14.2 P14.3 S1.2 S2.2 S3.2 S4.2 S5.2 S6.2 SW1.1 U1.4 U1.5 U1.6 U1.8 U1.14 U1.17 U1.18 U1.19 U1.20 U1.21 U1.22 U1.23 U1.24 U1.32 VR2.3

## Polygon pours and split planes (outlines as drawn)
GND on Bottom Layer "NONET_L-01_P-001" (solid, pour order 5): 60.076,114.852 60.465,115.242 124.898,115.242 124.898,99.245 124.845,99.192 125.356,98.682 136.165,98.682 136.165,114.767 136.122,114.81 136.362,115.05 154.982,115.05 154.982,50.092 154.804,49.914 60.076,49.914
GND on Bottom Layer "NONET_L-01_P-001" (solid, pour order 3): 60.161,114.938 60.332,114.767 124.845,114.767 124.845,99.192 124.76,99.107 125.185,98.682 136.165,98.682 136.165,114.512 135.994,114.682 136.25,114.938 154.804,114.938 154.804,50.254 154.974,50.084 154.804,49.914 60.076,49.914 60.076,114.682 59.991,114.767
GND on Top Layer "NONET_L-01_P-001" (solid, pour order 4): 60.117,114.954 60.29,114.78 124.935,114.78 124.935,99.25 125.09,99.095 125.187,99.191 136.048,99.191 136.048,114.836 136.026,114.857 154.884,114.857 154.898,114.871 154.988,114.78 154.988,49.86 59.833,49.86
GND on Top Layer "NONET_L-01_P-001" (solid, pour order 0): 59.726,114.834 59.78,114.78 124.935,114.78 124.935,99.254 124.753,99.072 124.844,98.982 135.83,98.982 135.83,115.053 136.012,114.871 154.898,114.871 154.898,50.133 155.079,49.951 154.988,49.86 59.833,49.86 59.833,114.69 59.924,114.78 59.833,114.871

## Keep-outs
Keep-Out Layer:
  lines w0.254: 59.983,50.036 154.988,50.002 155.005,114.978 135.991,114.978 136.008,99.045 124.976,98.993 124.994,115.007 60,115.007 59.983,50.036

## Silkscreen, mask and mechanical layers (free items; w line width, h text height)
Top Overlay:
  text "GND" at 94.978,114.333 h0.94 r270
  text "3V3" at 96.87,114.333 h0.94 r270
  text "TX" at 98.65,114.306 h0.94 r270
  text "3V3" at 106.609,114.3 h0.94 r270
  text "RST" at 102.469,114.262 h0.94 r270
  text "BOT" at 104.587,114.224 h0.94 r270
  text "RX" at 100.487,114.194 h0.94 r270
  text "<-" at 92.754,112.554 h0.94
  text "RST" at 78.124,74.608 h0.94
  text "GND" at 60.548,71.416 h0.94 r270
  text "CS" at 60.548,58.364 h0.94 r270
  text "+" at 133.754,54.597 h0.94
  text "_" at 133.754,52.911 h0.94
Bottom Overlay:
  text "Pamietaj RX<->TX" at 93.216,113.93 h0.94 r180
  text "AUTOMATYCZNY SEDZIA" at 96.249,53.975 h1.52
  text "by Mateusz M KoNaR PWr" at 95.266,51.294 h1.27
Mechanical 1:
  lines w0.254: 60,115 60,50 155,50 155,115 ; 60,115 125,115 ; 60,115 125,115 ; 125,115 125,99 136,99 136,115 ; 136,115 155,115 ; 136,115 155,115

## Text inside footprints (layer, text, board x,y; h text height)
P5: Top Overlay "6" at 65.128,69.978 h0.94; Top Overlay "1" at 65.262,57.194 h0.94
P10: Top Overlay "7" at 75.38,111.3 h0.94 r180; Top Overlay "1" at 90.36,111.3 h0.94 r180
P11: Top Overlay "16" at 112.44,86.2 h0.94; Top Overlay "1" at 74.85,86.2 h0.94
P12: Top Overlay "16" at 112.43,111.7 h0.94; Top Overlay "1" at 74.84,111.7 h0.94
U1: Mechanical 13 "ANTENNA" at 81.76,90.5 h0.94 r90